# Altium PCB PCB_final.PcbDoc
Units mm, origin at the board's own origin, x right, y up, seen from the top; angles counter-clockwise.
Board outline 99.57 x 101.6 mm, 4 copper layers (Top Layer, Mid Layer 1, Mid Layer 2, Bottom Layer), stack 1.57 mm thick; 55 components, 55 nets, 307 pads, 1 vias.
Unrouted connection lines stored in the file: 1.
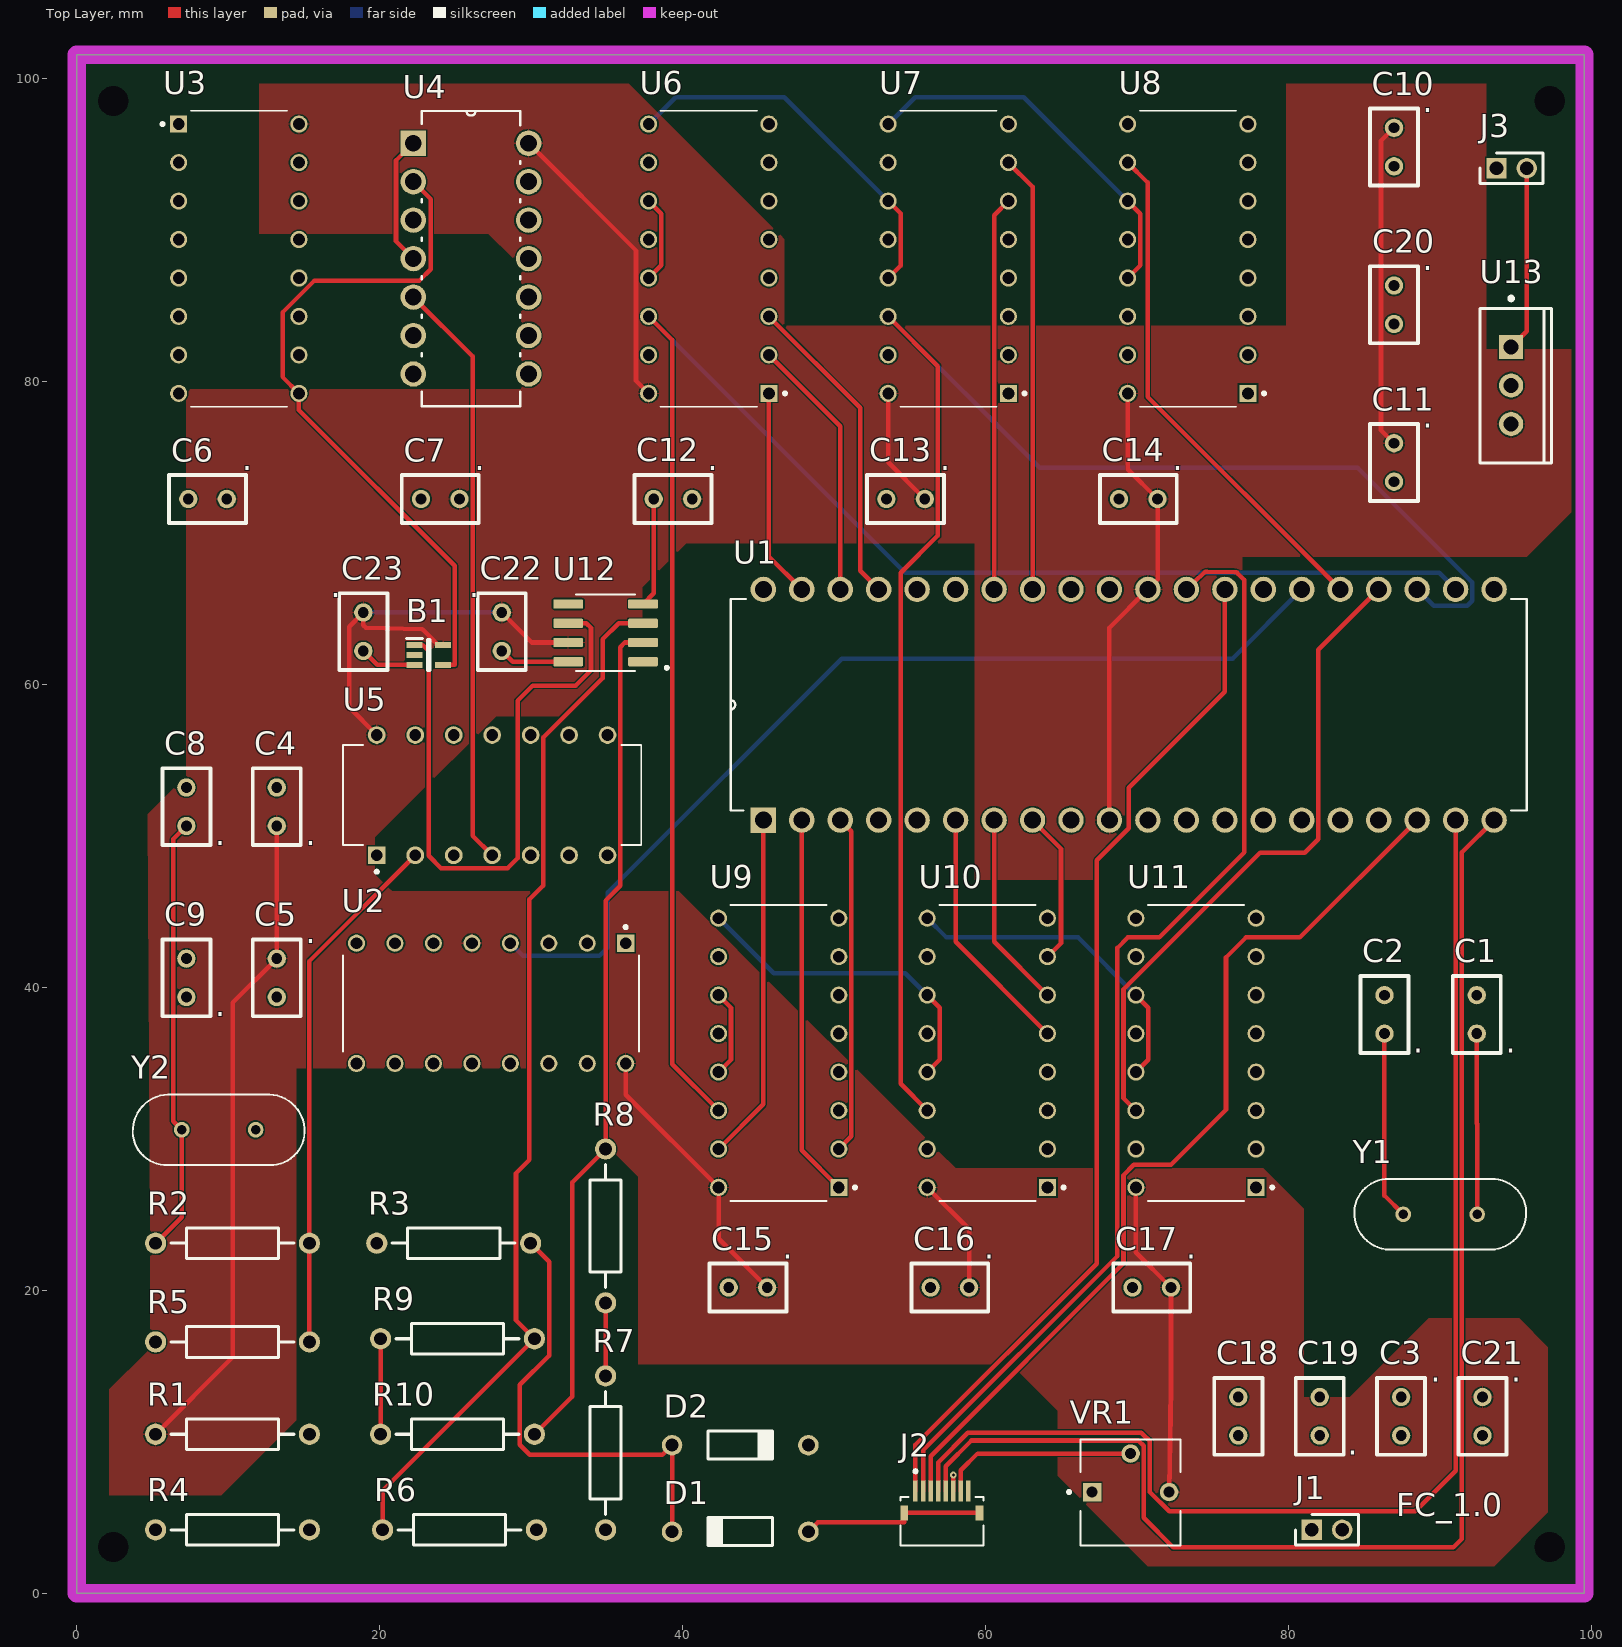
[diagram p0: Top Layer view]
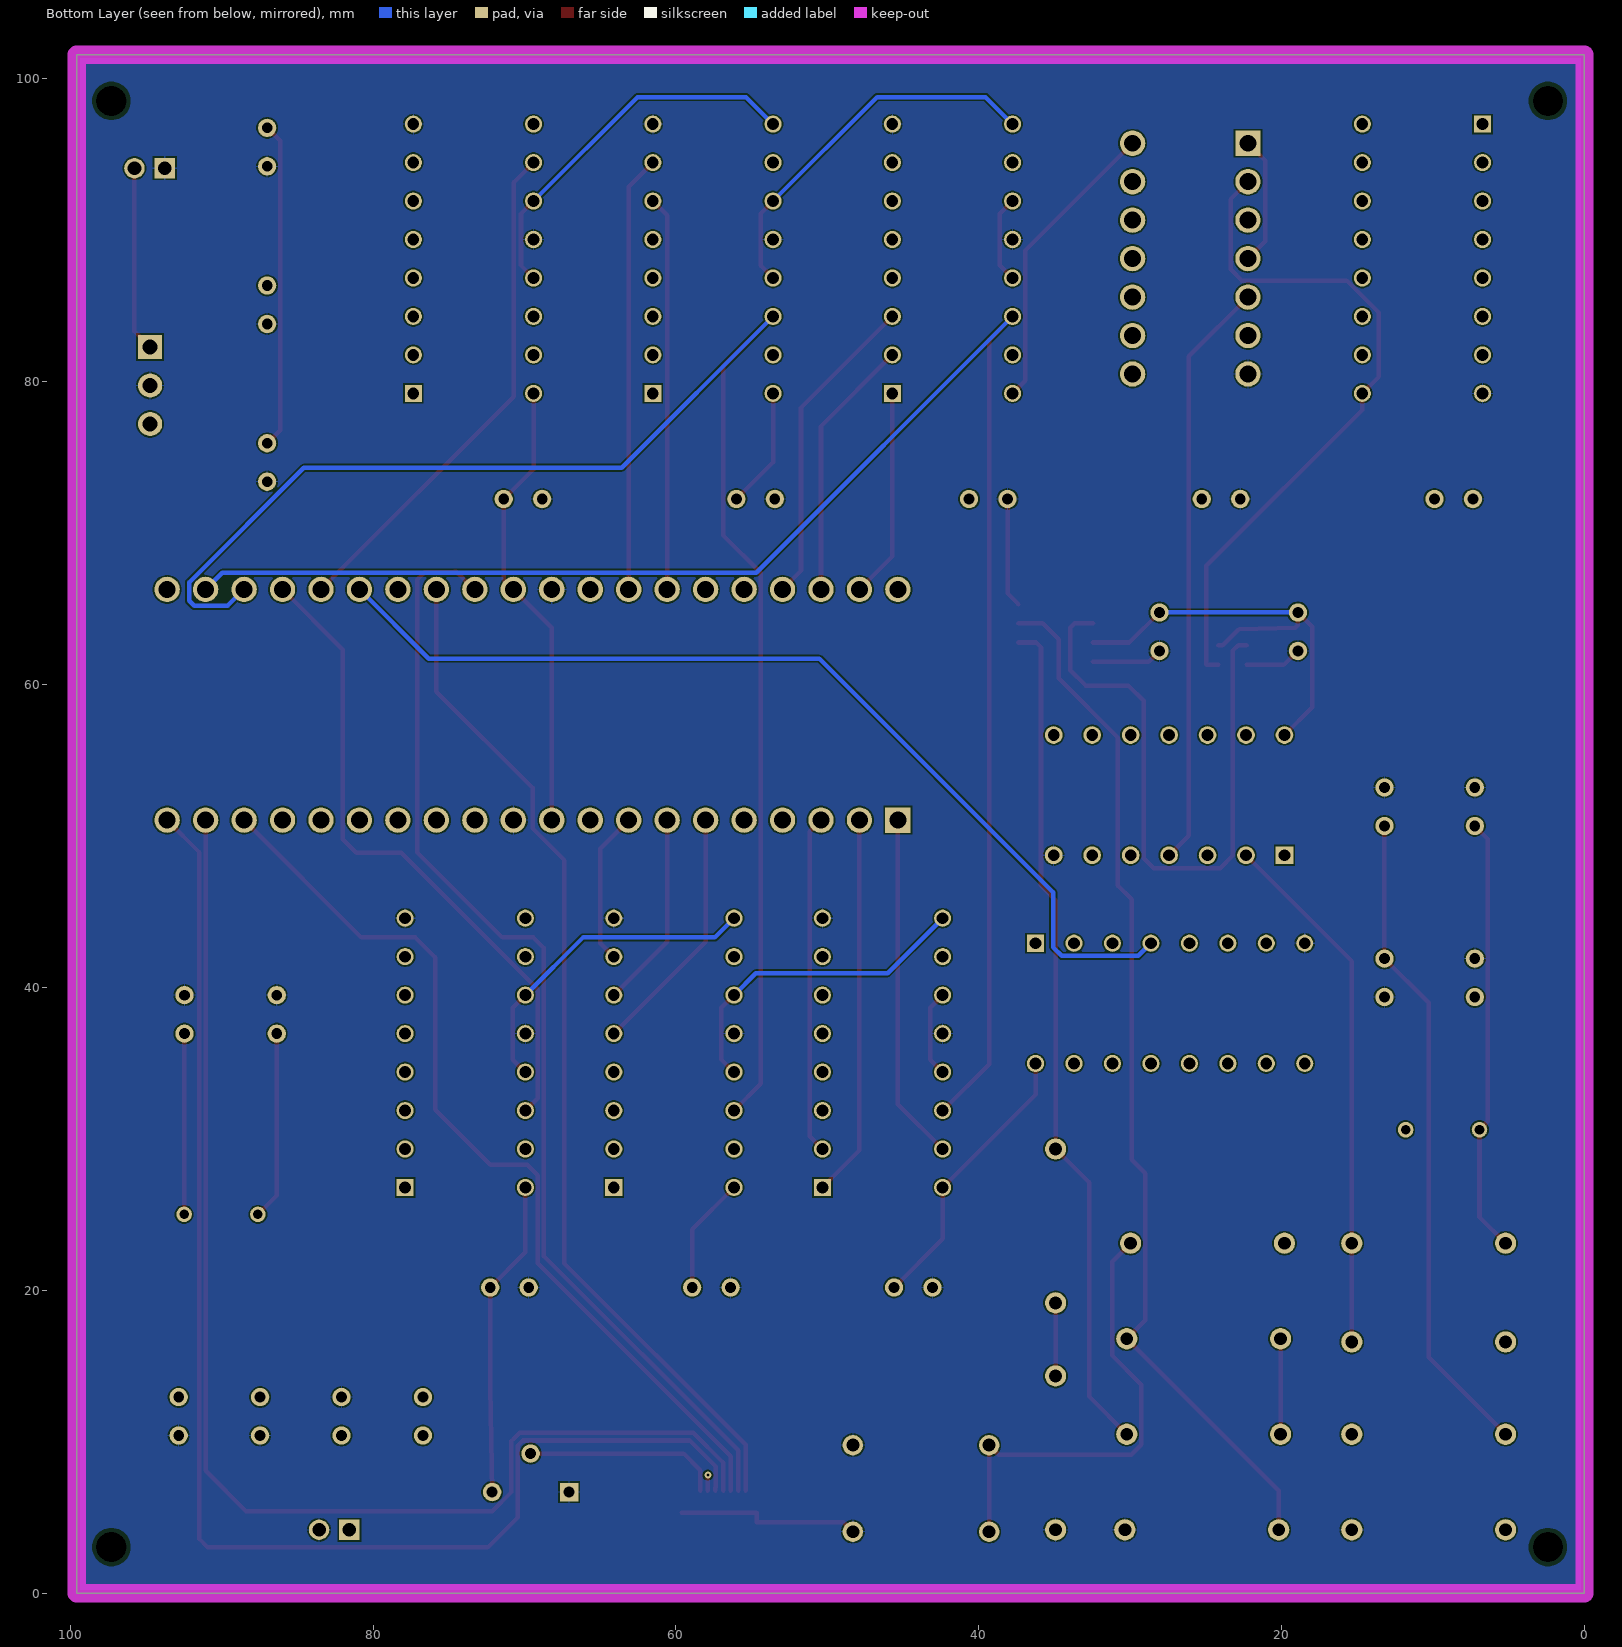
[diagram p1: Bottom Layer view, seen from below]
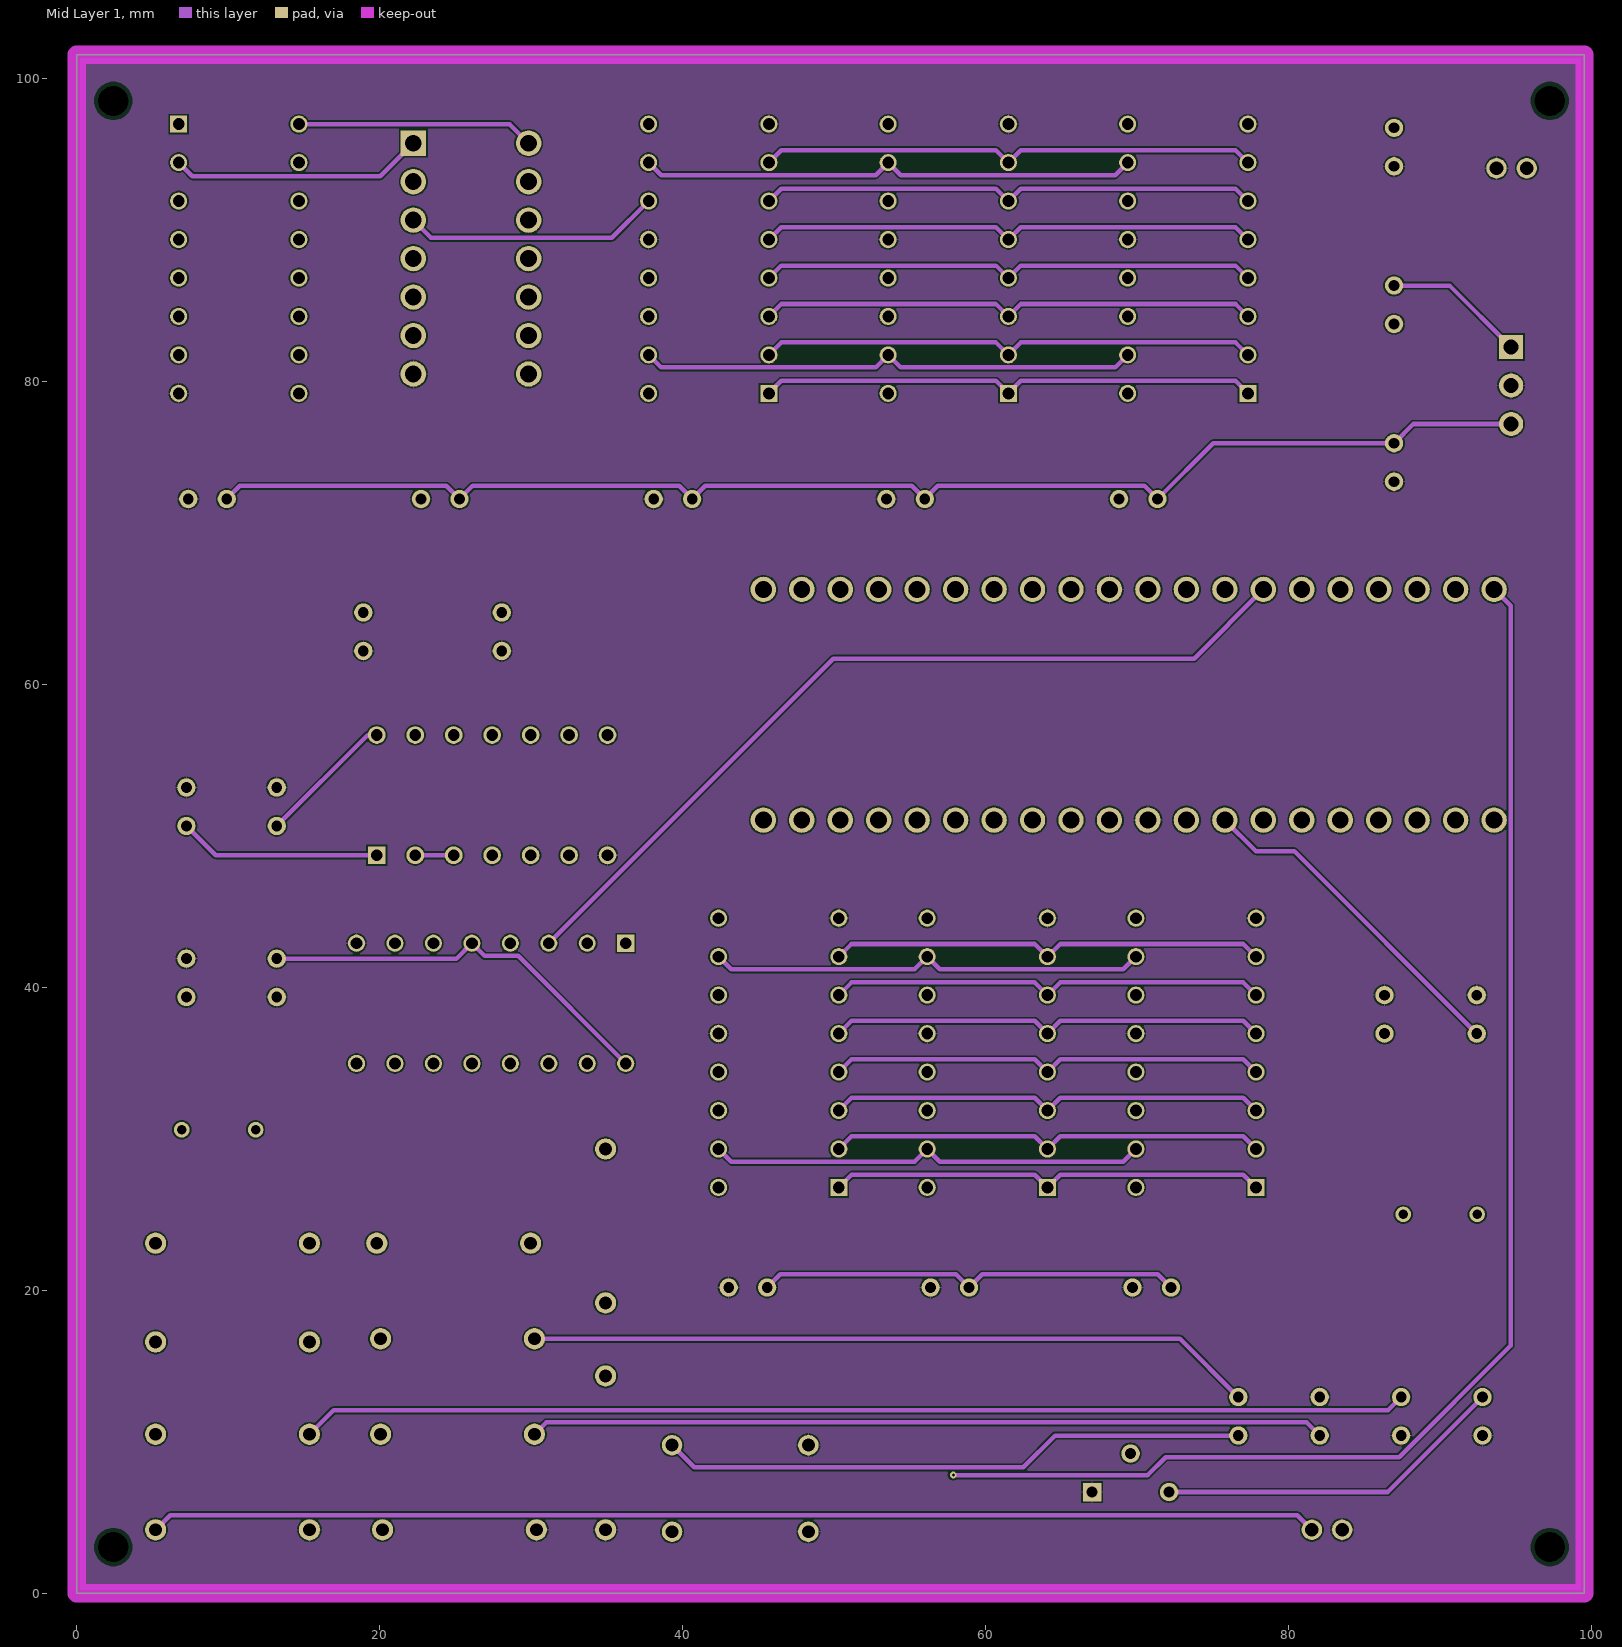
[diagram p2: Mid Layer 1]
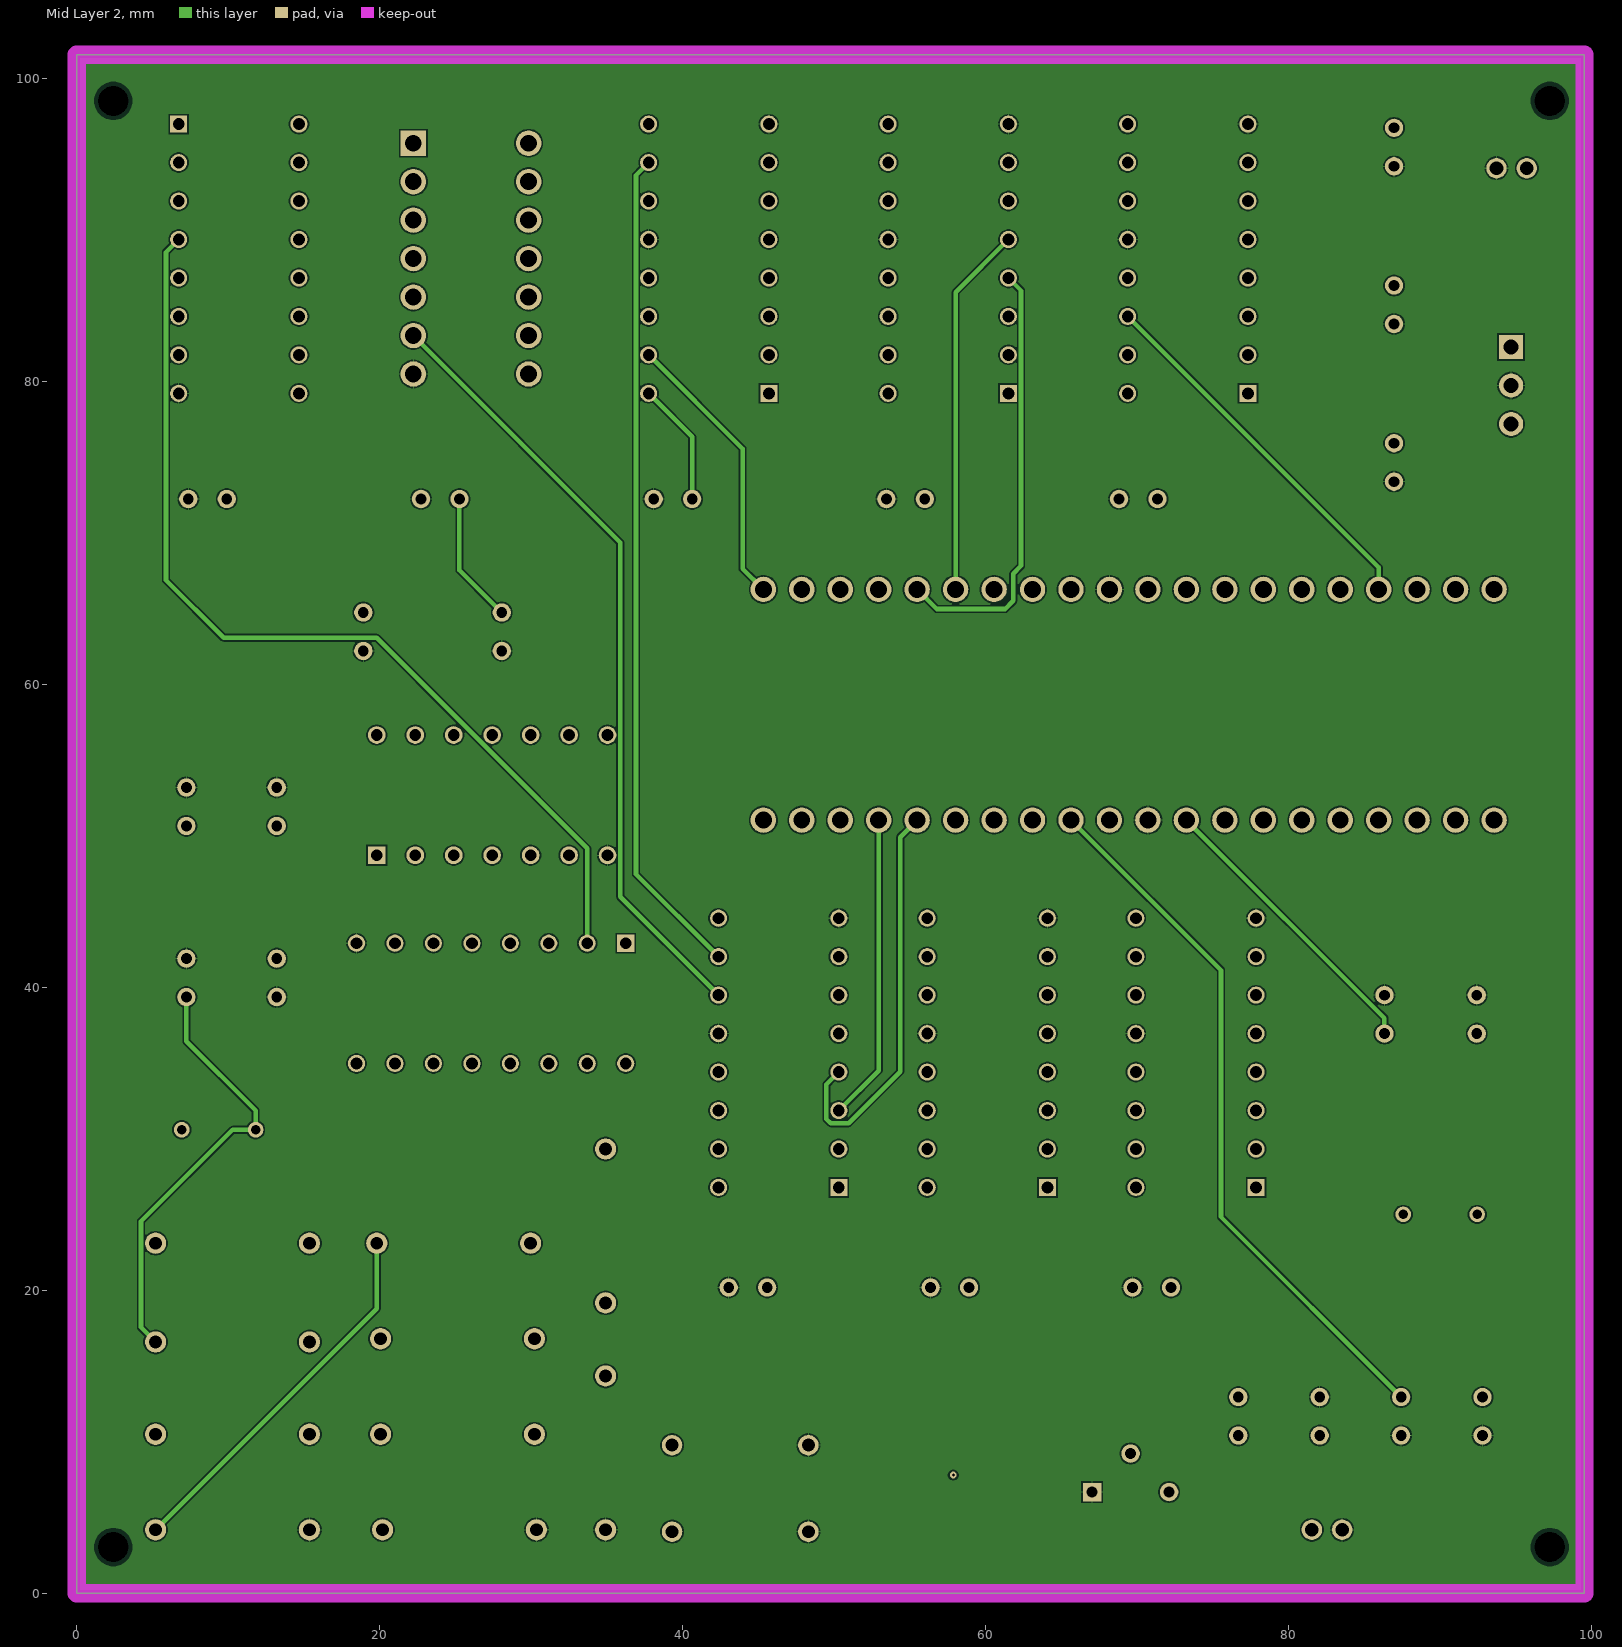
[diagram p3: Mid Layer 2]

## Layer stack, top to bottom
Top Solder: solder mask 0.0127, Solder Resist, Dk 3.8
Top Layer: signal copper 0.035
Dielectric 1: prepreg 0.1, 2313, Dk 4.05
Mid Layer 1: signal copper 0.0175
Core: core 1.265, FR-4, Dk 4.5
Mid Layer 2: signal copper 0.0175
Dielectric 2: prepreg 0.1, 2313, Dk 4.05
Bottom Layer: signal copper 0.035
Bottom Solder: solder mask 0.0127, Solder Resist, Dk 3.8

## Board outline
0,101.6 99.568,101.6 99.568,0 0,0

## Design rules (kind name [scope] priority, off if disabled: settings)
BoardOutlineClearance [All] p1: gap=0.2 ignorepadtopadclearanceinfootprint=FALSE
Clearance [All] p1: gap=0.102 ignorepadtopadclearanceinfootprint=FALSE except(0.127: Arc-Via Track-Via SMDPad-Via THPad-Via Via-Via Via-Fill Via-Poly Via-Region Via-Text; 0.25: Arc-Hole Track-Hole SMDPad-Hole THPad-Hole Via-Hole Fill-Hole Poly-Hole Region-Hole Text-Hole)
ComponentClearance [All] p1: gap=0.102 collisioncheckmode=3 verticalgap=0.102 showdistances=TRUE
DiffPairsRouting [All] p1: maxlimit=0.102 minlimit=0.102 mostfreqgap=0.102 toplayer_minwidth=0.102 toplayer_maxwidth=1816.048 toplayer_prefwidth=0.102 midlayer1_minwidth=0.102 midlayer1_maxwidth=1816.048 midlayer1_prefwidth=0.102 midlayer2_minwidth=0.102 midlayer2_maxwidth=1816.048 midlayer2_prefwidth=0.102 bottomlayer_minwidth=0.102 bottomlayer_maxwidth=1816.048 bottomlayer_prefwidth=0.102 maxuncoupledlength=12.7
Height [All] p1: minheight=0 maxheight=1816.048 prefheight=12.7
HoleSize [All] p1: absolutevalues=TRUE maxlimit=6.3 minlimit=0.2 maxpercent=80.000 minpercent=20.000
HoleToHoleClearance [All] p1: gap=0.25 allowstackedmicrovias=FALSE
MinimumAnnularRing [All] p1: minimumring=0.076
MinimumSolderMaskSliver [All] p1: minsoldermaskwidth=0
PlaneClearance [All] p1: clearance=0.102
PlaneConnect PlaneConnectPowerPads [InPadClass('PowerPads')] p1: planeconnectstyle=Direct reliefexpansion=0.508 reliefentries=4 reliefconductorwidth=0.254 reliefairgap=0.254
PlaneConnect [All] p2: pad.planeconnectstyle=Relief pad.reliefexpansion=0.3 pad.reliefentries=4 pad.reliefconductorwidth=0.102 pad.reliefairgap=0.102 via.planeconnectstyle=Direct via.reliefexpansion=0.3 via.reliefentries=4 via.reliefconductorwidth=0.127 via.reliefairgap=0.127
PolygonConnect PolygonConnectPowerPads [All vs (InPadClass('PowerPads'))] p1: connectstyle=Direct reliefconductorwidth=0.254 reliefentries=4 polygonreliefangle="90 Angle" airgapwidth=0.254
PolygonConnect [All] p2: thpad.connectstyle=Relief thpad.reliefconductorwidth=0.102 thpad.reliefentries=4 thpad.polygonreliefangle="90 Angle" thpad.airgapwidth=0.102 smdpad.connectstyle=Relief smdpad.reliefconductorwidth=0.102 smdpad.reliefentries=4 smdpad.polygonreliefangle="90 Angle" smdpad.airgapwidth=0.102 via.connectstyle=Direct via.reliefconductorwidth=0.127 via.reliefentries=4 via.polygonreliefangle="90 Angle" via.airgapwidth=0.127
RoomDefinition FC_schemetic [InComponentClass('FC_schemetic')] p1: confinementstyle=ConfineIn formatcopy=TRUE lockcomponents=FALSE outline 0,0 99.568,0 99.568,101.6 0,101.6
RoutingVias [All] p1: holewidth=0.2 width=0.45 viastyle="Through Hole" minholewidth=0.2 minwidth=0.45 maxholewidth=6.3 maxwidth=6.55
SilkToSilkClearance [All] p1: silktosilkclearance=0
SilkToSolderMaskClearance [IsPad] p1: minsilkscreentomaskgap=0.102 clearancetoexposedcopper=TRUE
SolderMaskExpansion [All] p1: expansion=0.075 istentingtop=FALSE
Width [All] p1: maxlimit=1 minlimit=0.2 preferedwidth=0.3 minimp=50.000000 maximp=50.000000 favimp=50.000000
20 further rules are at their usual default settings.

## Components (designator, comment, footprint, x,y, rotation, side; value= is the part's Value field where it differs from the comment)
B1 "74AHC1G4208GWH" SOT65P212X110-5N 23.241,61.958 r0 top
C1 "SR201C223KAR" AVX-SR20 92.456,38.227 r270 top
C2 "SR201C223KAR" AVX-SR20 86.36,38.227 r270 top
C3 "SR201C223KAR" AVX-SR20 87.461,11.684 r90 top
C4 "SR201C223KAR" AVX-SR20 13.208,51.943 r270 top
C5 "SR201C223KAR" AVX-SR20 13.208,40.64 r90 top
C6 "SR201C223KAR" AVX-SR20 8.636,72.263 r0 top
C7 "SR201C223KAR" AVX-SR20 24.003,72.263 r0 top
C8 "SR201C223KAR" AVX-SR20 7.239,51.943 r270 top
C9 "SR201C223KAR" AVX-SR20 7.239,40.64 r270 top
C10 "SR201C223KAR" AVX-SR20 86.995,95.504 r90 top
C11 "SR201C223KAR" AVX-SR20 86.995,74.676 r90 top
C12 "SR201C223KAR" AVX-SR20 39.37,72.263 r0 top
C13 "SR201C223KAR" AVX-SR20 54.737,72.263 r0 top
C14 "SR201C223KAR" AVX-SR20 70.104,72.263 r0 top
C15 "SR201C223KAR" AVX-SR20 44.323,20.193 r0 top
C16 "SR201C223KAR" AVX-SR20 57.658,20.193 r0 top
C17 "SR201C223KAR" AVX-SR20 70.993,20.193 r0 top
C18 "SR201C223KAR" AVX-SR20 76.708,11.684 r270 top
C19 "SR201C223KAR" AVX-SR20 82.084,11.684 r270 top
C20 "SR201C223KAR" AVX-SR20 86.995,85.09 r90 top
C21 "SR201C223KAR" AVX-SR20 92.837,11.684 r90 top
C22 "SR201C223KAR" AVX-SR20 28.067,63.5 r270 top
C23 "SR201C223KAR" AVX-SR20 18.923,63.5 r270 top
D1 "1N4148" NXP-SOD27-2_V 43.815,4.064 r180 top
D2 "1N4148" NXP-SOD27-2_V 43.815,9.779 r0 top
J1 "M22-2010205" HDRV2W50P0X200_1X2_400X200X525P 81.566,4.191 r0 top
J2 "59453-082110EDHLF" AMPHENOL_59453-082110EDHLF 57.138,5.305 r0 top
J3 "M22-2010205" HDRV2W50P0X200_1X2_400X200X525P 93.758,94.107 r0 top
R1 "Res2" AXIAL-0.4 10.287,10.499 r180 top value=1K
R2 "Res2" AXIAL-0.4 10.287,23.114 r180 top value=1K
R3 "Res2" AXIAL-0.4 24.892,23.114 r180 top value=1K
R4 "Res2" AXIAL-0.4 10.287,4.191 r0 top value=1K
R5 "Res2" AXIAL-0.4 10.287,16.595 r180 top value=1K
R6 "Res2" AXIAL-0.4 25.273,4.191 r180 top value=1K
R7 "Res2" AXIAL-0.4 34.925,9.271 r90 top value=1K
R8 "Res2" AXIAL-0.4 34.925,24.257 r90 top value=1K
R9 "Res2" AXIAL-0.4 25.146,16.806 r180 top value=1K
R10 "Res2" AXIAL-0.4 25.146,10.499 r180 top value=1K
U1 "ATMEGA32A-PU" DIP254P1524X482-40 93.599,66.294 r90 top
U2 "CD4043BE" DIP794W45P254L1969H508Q16 27.362,38.956 r270 top
U3 "SN74LS175N" DIP794W45P254L1969H508Q16 10.701,88.129 r0 top
U4 "74HC08N,652" DIP254P762X420-14 29.843,80.518 r0 top
U5 "SN7414N" DIP794W45P254L1969H508Q14 27.432,52.705 r90 top
U6 "SN74HC590AN" DIP794W45P254L1969H508Q16 41.738,88.129 r180 top
U7 "SN74HC590AN" DIP794W45P254L1969H508Q16 57.555,88.129 r180 top
U8 "SN74HC590AN" DIP794W45P254L1969H508Q16 73.373,88.129 r180 top
U9 "SN74HC590AN" DIP794W45P254L1969H508Q16 46.355,35.687 r180 top
U10 "SN74HC590AN" DIP794W45P254L1969H508Q16 60.134,35.687 r180 top
U11 "SN74HC590AN" DIP794W45P254L1969H508Q16 73.914,35.687 r180 top
U12 "TLV3501AIDR" SOIC127P599X175-8N 34.925,63.422 r180 top
U13 "LM7805CT" FAIR-TO-220-3 94.723,79.756 r0 top
VR1 "3362P-1-253LF" TRIM_3362P-1-253LF 69.596,6.685 r0 top
Y1 "ECS-240.0001-18-1X" XTAL_ECS-200-20-1X 90.043,25.019 r180 top
Y2 "ECS-240.0001-18-1X" XTAL_ECS-200-20-1X 9.371,30.607 r0 top

## Footprints (in the part's own frame and the unit in brackets; to place one, negate y for a bottom-side part, rotate by r counter-clockwise, add the part's x,y. Pads: shape width x height; smd on the part's side, far side on the other; paste and mask are expansions set on the pad)
AMPHENOL_59453-082110EDHLF [mm]
  rect 0.3x1.4 smd: 1(-1.75,1.45) 2(-1.25,1.45) 3(-0.75,1.45) 4(-0.25,1.45) 5(0.25,1.45) 6(0.75,1.45) 7(1.25,1.45) 8(1.75,1.45)
  rect 0.52x1 smd: S1(-2.49,0) S2(2.49,0)
  silkscreen extent -2.75,-2.15 2.75,2.85
AVX-SR20 [mm]
  round 1.21 hole 0.71: 1(-1.27,0) 2(1.27,0)
  silkscreen extent -2.54,-1.59 2.54,1.59
AXIAL-0.4 [mm] "Axial Device, Thru-Hole; 2 Leads; 0.4 in Pin Spacing"
  round 1.4 hole 0.85: 1(-5.08,0) 2(5.08,0)
  silkscreen extent -4.06,-1.02 4.06,1.02
DIP254P762X420-14 [mil]
  rect 66x66 hole 44: 1(-300,600)
  round 66 hole 44: 2(-300,500) 3(-300,400) 4(-300,300) 5(-300,200) 6(-300,100) 7(-300,0) 8(0,0) 9(0,100) 10(0,200) 11(0,300) 12(0,400) 13(0,500) 14(0,600)
  silkscreen extent -278,-84 -22,684
DIP254P1524X482-40 [mil]
  rect 66x66 / inner round 66 / far side rect 66x66 hole 44: 1(-600,1900)
  round 66 hole 44: 2(-600,1800) 3(-600,1700) 4(-600,1600) 5(-600,1500) 6(-600,1400) 7(-600,1300) 8(-600,1200) 9(-600,1100) 10(-600,1000) 11(-600,900) 12(-600,800) 13(-600,700) 14(-600,600) 15(-600,500) 16(-600,400) 17(-600,300) 18(-600,200) 19(-600,100) 20(-600,0) 21(0,0) 22(0,100) 23(0,200) 24(0,300) 25(0,400) 26(0,500) 27(0,600) 28(0,700) 29(0,800) 30(0,900) 31(0,1000) 32(0,1100) 33(0,1200) 34(0,1300) 35(0,1400) 36(0,1500) 37(0,1600) 38(0,1700) 39(0,1800) 40(0,1900)
  silkscreen extent -575,-85 -25,1985
DIP794W45P254L1969H508Q14 [mm]
  rect 1.17x1.17 hole 0.77: 1(-3.97,7.62)
  round 1.17 hole 0.77: 2(-3.97,5.08) 3(-3.97,2.54) 4(-3.97,0) 5(-3.97,-2.54) 6(-3.97,-5.08) 7(-3.97,-7.62) 8(3.97,-7.62) 9(3.97,-5.08) 10(3.97,-2.54) 11(3.97,0) 12(3.97,2.54) 13(3.97,5.08) 14(3.97,7.62)
  silkscreen extent -5.15,-9.84 3.3,9.84
DIP794W45P254L1969H508Q16 [mm]
  rect 1.13x1.13 hole 0.78: 1(-3.97,8.89)
  round 1.13 hole 0.78: 2(-3.97,6.35) 3(-3.97,3.81) 4(-3.97,1.27) 5(-3.97,-1.27) 6(-3.97,-3.81) 7(-3.97,-6.35) 8(-3.97,-8.89) 9(3.97,-8.89) 10(3.97,-6.35) 11(3.97,-3.81) 12(3.97,-1.27) 13(3.97,1.27) 14(3.97,3.81) 15(3.97,6.35) 16(3.97,8.89)
  silkscreen extent -5.13,-9.77 3.18,9.77
FAIR-TO-220-3 [mm] "FM, 3-Leads, Body 10.2x4.7mm, Pitch 2.54mm"
  rect 1.6x1.6 hole 1: 1(0,2.54)
  round 1.6 hole 1: 2(0,0) 3(0,-2.54)
  silkscreen extent -2.04,-5.1 2.66,5.87, body extent -2.04,-5.1 2.66,5.1, height 18.95
HDRV2W50P0X200_1X2_400X200X525P [mm]
  rect 1.35x1.35 / inner round 1.35 / far side rect 1.35x1.35 hole 0.9: 1(0,0)
  round 1.35 hole 0.9: 2(2,0)
  silkscreen extent -1.07,-1 3.07,1
NXP-SOD27-2_V [mm] "SOD27, 2-Leads, Dia 1.85mm, Body Length 4.25mm, Pin Spacing 9mm"
  round 1.35 hole 0.85: 1(-4.5,0) 2(4.5,0)
  silkscreen extent -2.13,-0.93 2.13,0.93, body extent -4.78,-0.93 4.78,0.92, height 1.85
SOIC127P599X175-8N [mm]
  rrect25% 1.97x0.6 smd: 1(-2.47,1.905) 2(-2.47,0.635) 3(-2.47,-0.635) 4(-2.47,-1.905) 5(2.47,-1.905) 6(2.47,-0.635) 7(2.47,0.635) 8(2.47,1.905)
  silkscreen extent -4.14,-2.53 1.95,2.53, body extent -3,-2.45 3,2.45, height 1.75
SOT65P212X110-5N [mm]
  rect 1.05x0.4 smd: 1(-0.95,0.65) 2(-0.95,0) 3(-0.95,-0.65) 4(0.95,-0.65) 5(0.95,0.65)
  silkscreen extent -1.48,-1.02 0.07,1.1
TRIM_3362P-1-253LF [mm]
  rect 1.222x1.222 hole 0.714: 1(-2.54,0)
  round 1.222 hole 0.714: 2(0,2.54) 3(2.54,0)
  silkscreen extent -4.16,-3.53 3.3,3.47
XTAL_ECS-200-20-1X [mm]
  round 1.03 hole 0.63: 1(-2.44,0) 2(2.44,0)
  silkscreen extent -5.68,-2.33 5.68,2.33

## Part data
B1: "vp_74AHC1G4208.ditamap - 8-stage divider and oscillator@en-us", Manufacturer_Name=Nexperia, Mouser Part Number=771-74AHC1G4208GWH, Arrow Part Number=74AHC1G4208GWH, Arrow Price/Stock=https://www.arrow.com/en/products/74ahc1g4208gwh/nexperia?region=nac, Datasheet Link=https://assets.nexperia.com/documents/data-sheet/74AHC1G4208.pdf, Geometry.Height=1.1mm, Manufacturer_Part_Number=74AHC1G4208GWH, Mouser Price/Stock=https://www.mouser.co.uk/ProductDetail/Nexperia/74AHC1G4208GWH?qs=17u8i%2FzlE8%2FxKrIMt8zS2A%3D%3D
C1 C2 C3 C4 C5 C6 C7 C8 C9 C10 C11 C12 C13 C14 C15 C16 C17 C18 C19 C20 C21 C22 C23: "Cap Ceramic 0.022uF 100V X7R 10% Radial 2.54mm 125C Bulk", Manufacturer_Name=AVX, Arrow Part Number=SR201C223KAR, Arrow Price/Stock=https://www.arrow.com/en/products/sr201c223kar/avx, Datasheet Link=http://datasheets.avx.com/SR-Series.pdf, Manufacturer_Part_Number=SR201C223KAR
D1 D2: library part CMP-004-00000-2, "High Speed Diode, 100 V, 0.45 A, -65 to 175 degC, 2-Pin SOD27, RoHS, Bulk", Case/Package=DO, Forward Current=300mA, Forward Voltage=1V, Manufacturer=Fairchild, Max Operating Temperature=175°C, Max Surge Current=4A, Min Operating Temperature=-65°C, Package Quantity=2000, Package Reference=SOD27, Peak Reverse Current=5uA, Power=500mW, Datasheet URL=http://www.nxp.com/documents/data_sheet/1N4148_1N4448.pdf, Datasheet Version=Aug-04, Diameter=1.91mm, Elements=1, Manufacturer URL=https://www.fairchildsemi.com/, Package URL=http://www.nxp.com/documents/data_sheet/1N4148_1N4448.pdf, Packaging=Bulk, Pins=2, Recovery Time=4ns, RoHS Compliant=True
J1 J3: "Header, SIL, vertical, 2 way, 2mm pitch HARWIN M22-20 Series, 2mm Pitch 2 Way 1 Row Straight PCB Header, Solder Termination, 1A", Manufacturer_Name=Harwin, Mouser Part Number=855-M22-2010205, Datasheet Link=http://uk.rs-online.com/web/p/products/6813287, Geometry.Height=5.25mm, Manufacturer_Part_Number=M22-2010205, Mouser Price/Stock=https://www.mouser.co.uk/ProductDetail/Harwin/M22-2010205?qs=xxdqPuaJ%252Ba2I8VeWvpQIzQ%3D%3D
J2: "0.50mm Flex Connectors, FPC/FFC Side Entry ZIF Connector, Surface Mount, 8 Positions, Top Contact, 0.50mm (0.020in) Pitch", Package=None, Availability="In Stock", Check_prices=https://www.snapeda.com/parts/59453-082110EDHLF/Amphenol%20FCI/view-part/5519599/?ref=eda, MF="Amphenol ICC (FCI)", MP=59453-082110EDHLF, Price=None, SnapEDA_Link=https://www.snapeda.com/parts/59453-082110EDHLF/Amphenol%20FCI/view-part/5519599/?ref=snap
R1 R2 R3 R4 R5 R6 R7 R8 R9 R10: "Resistor", LatestRevisionDate=17-Jul-2002, LatestRevisionNote="Re-released for DXP Platform.", PackageDescription="Axial Device, Thru-Hole; 2 Leads; 0.4 in Pin Spacing", PackageReference=AXIAL-0.4, Published=8-Jun-2000, Publisher="Altium Limited"
U1: "AVR AVRÂ® ATmega Microcontroller IC 8-Bit 16MHz 32KB (16K x 16) FLASH 40-PDIP", Package="PDIP-40 Microchip", Availability="In Stock", Check_prices=https://www.snapeda.com/parts/ATMEGA32A-PU/Microchip/view-part/?ref=eda, MF=Microchip, MP=ATMEGA32A-PU, Price=None, Purchase-URL=https://pricing.snapeda.com/search/part/ATMEGA32A-PU/?ref=eda, SnapEDA_Link=https://www.snapeda.com/parts/ATMEGA32A-PU/Microchip/view-part/?ref=snap
U2: "CMOS Quad NOR R/S Latch with 3-State Outputs 16-PDIP -55 to 125", Package="PDIP-16 Texas Instruments", Arrow_Electronics-Purchase-URL=https://snapeda.com/shop?store=Arrow+Electronics&id=577167, Availability=Good, BuyPart=https://www.snapeda.com/parts/CD4043BE/Texas%20Instruments/view-part/577167/?ref=eda, DigiKey-Purchase-URL=https://snapeda.com/shop?store=DigiKey&id=577167, MF="Texas Instruments", Mouser-Purchase-URL=https://snapeda.com/shop?store=Mouser&id=577167, MP=CD4043BE, Price=None, SnapEDA_Link=https://www.snapeda.com/parts/CD4043BE/Texas%20Instruments/view-part/577167/?ref=snap, Texas_Instruments-Purchase-URL=https://snapeda.com/shop?store=Texas+Instruments&id=577167
U3: "Quadruple D-Type Flip-Flops With Clear 16-PDIP 0 to 70", Package="PDIP-16 Texas Instruments", Check_prices=https://www.snapeda.com/parts/SN74LS175N/Texas%20Instruments/view-part/572262/?ref=eda, Digi-Key_Part_Number=296-28719-2-ND, MF="Texas Instruments", MP=SN74LS175N, Purchase-URL=https://pricing.snapeda.com/search/part/SN74LS175N/?ref=eda, SnapEDA_Link=https://www.snapeda.com/parts/SN74LS175N/Texas%20Instruments/view-part/572262/?ref=snap
U4: "AND Gate IC 4 Channel 14-DIP", Package="DIP-14 NXP Semiconductors", Availability=Warning, BuyPart=https://www.snapeda.com/parts/74HC08N,652/NXP%20USA%20Inc./view-part/41634/?ref=eda, DigiKey-Purchase-URL=https://snapeda.com/shop?store=DigiKey&id=41634, MF="NXP USA", MP=74HC08N,652, Price=None, SnapEDA_Link=https://www.snapeda.com/parts/74HC08N,652/NXP%20USA%20Inc./view-part/41634/?ref=snap
U5: "Hex schmitt-trigger inverters 14-PDIP 0 to 70", Package="PDIP-14 Texas Instruments", Availability=Warning, Check_prices=https://www.snapeda.com/parts/SN7414N/Texas%20Instruments/view-part/51455/?ref=eda, DigiKey-Purchase-URL=https://snapeda.com/shop?store=DigiKey&id=51455, MF="Texas Instruments", Mouser-Purchase-URL=https://snapeda.com/shop?store=Mouser&id=51455, MP=SN7414N, Price=None, SnapEDA_Link=https://www.snapeda.com/parts/SN7414N/Texas%20Instruments/view-part/51455/?ref=snap, Texas_Instruments-Purchase-URL=https://snapeda.com/shop?store=Texas+Instruments&id=51455
U6 U7 U8 U9 U10 U11: "8-Bit Binary Counters With 3-State Output Registers 16-PDIP -40 to 85", Package="PDIP-16 Texas Instruments", BuyPart=https://www.snapeda.com/parts/SN74HC590AN/Texas%20Instruments/view-part/385662/?ref=eda, Digi-Key_Part_Number=SN74HC590ANG4-ND, MF="Texas Instruments", MP=SN74HC590AN, SnapEDA_Link=https://www.snapeda.com/parts/SN74HC590AN/Texas%20Instruments/view-part/385662/?ref=snap, Texas_Instruments-Purchase-URL=https://snapeda.com/shop?store=Texas+Instruments&id=385662
U12: "4.5ns, Rail-to-Rail, High Speed Comparator with Shutdown 8-SOIC -40 to 125", Package="SOIC-8 Texas Instruments", Check_prices=https://www.snapeda.com/parts/TLV3501AIDR/Texas+Instruments/view-part/?ref=eda, Digi-Key_Part_Number=296-43611-1-ND, MF="Texas Instruments", MP=TLV3501AIDR, Purchase-URL=https://pricing.snapeda.com/search/part/TLV3501AIDR/?ref=eda, SnapEDA_Link=https://www.snapeda.com/parts/TLV3501AIDR/Texas+Instruments/view-part/?ref=snap
U13: library part CMP-2000-04938-1, "Positive Voltage Regulator, 5 V, 1 A, -40 to 125 degC, 3-Pin TO-220, RoHS, Tube", Manufacturer=FairchildSemiconductor, Maximum Input Voltage=35V, Maximum Output Current=2.2(Typ)A, Maximum Quiescent Current=8mA, Operating Temperature=-40to125degC, Output Voltage=5V, Package=3TO-220AB, Package Description="3-Pin Through Hole Device, Body 10 x 4.5 mm, Pitch 2.54 mm", Package Reference=TO-220, Typical Dropout Voltage @ Current=2@1AV, Accuracy=±4%, Category=LinearRegulator, Datasheet URL=https://datasheet.ciiva.com/26904/lm7805ct-26904988.pdf, Datasheet Version=Aug-12, Line Regulation=100mV, Load Regulation=100mV, Manufacturer URL=https://www.fairchildsemi.com/, Mounting=ThroughHole, Number of Outputs=1, Output Type=Fixed, Package URL=https://www.fairchildsemi.com/package-drawings/TO/TO220B03.pdf, Packaging=Rail/Tube, Polarity=Positive, Rad Hard=No, Type=Linear
VR1: "25 kOhms 0.5W, 1/2W PC Pins Through Hole Trimmer Potentiometer Cermet 1 Turn Top Adjustment", Package="3116 Bourns", Availability=Good, Check_prices=https://www.snapeda.com/parts/3362P-1-253LF/Bourns/view-part/493663/?ref=eda, MF=Bourns, MP=3362P-1-253LF, Price=None, Purchase-URL=https://pricing.snapeda.com/search/part/3362P-1-253LF/?ref=eda, SnapEDA_Link=https://www.snapeda.com/parts/3362P-1-253LF/Bourns/view-part/493663/?ref=snap
Y1 Y2: "Crystals / Oscillators / Resonators 24.00014MHz 18pF", Package="HC49/U ECS International", Availability=Unavailable, MF="ECS International", MP=ECS-240.0001-18-1X, Price=None, SnapEDA_Link=https://www.snapeda.com/parts/ECS-240.0001-18-1X/ECS%20International/view-part/259232/?ref=snap

## Free pads (board coordinates)
  round 0 hole 2 unplated: 9(2.413,3.048) 9(2.413,98.552) 9(97.282,3.048) 9(97.282,98.552)

## Via types
v1: diameter 0.45, hole 0.2, Top Layer to Bottom Layer, 1 vias

## Nets (pads, with @x,y where several pads share a name; then routed paths per layer and width w, separated by ;. In a path a pad name is that pad's centre, name@x,y a point inside that pad or via, vN(x,y) a via of type N, cw(c..) or ccw(c..) an arc to the next point about the centre after c; other vN are vias at no path point)
+5: B1.5 C4.2 C5.2 C6.2 C7.2 C10.2 C11.2 C12.2 C13.2 C14.2 C15.2 C16.2 C17.2 C21.2 C22.1 C23.1 R1.2 U1.10 U1.30 U2.5 U2.16 U3.16 U4.14 U5.14 U6.16 U7.16 U8.16 U9.16 U10.16 U11.16 U12.7 U13.3 VR1.3 | length 410.3
  Top Layer w0.3: R1.2 10.287,15.579 10.287,38.989 C5.2 C4.2 ; U5.14 17.983,58.504 17.983,63.83 C23.1 18.923,63.924 19.096,63.75 22.81,63.674 22.896,63.588 23.876,62.608 B1.5 ; C22.1 30.05,62.787 U12.7 ; U4.14 36.932,88.67 36.932,80.076 U6.16 ; U2.16 36.252,32.93 U9.16 42.385,23.401 C15.2 ; U7.16 53.585,74.685 C13.2 ; U10.16 58.928,24.033 C16.2 ; U1.10 68.199,63.754 U1.30 71.374,66.929 C14.2 69.403,74.234 U8.16 ; U11.16 69.944,22.512 C17.2 72.263,13.589 VR1.3 ; C11.2 86.131,76.81 86.131,95.91 C10.2
  Mid Layer 1 w0.3: C6.2 10.77,73.127 24.409,73.127 C7.2 26.137,73.127 39.776,73.127 C12.2 41.504,73.127 55.143,73.127 C13.2 56.871,73.127 70.51,73.127 C14.2 75.057,75.946 C11.2 88.265,77.216 U13.3 ; C5.2 25.076,41.91 U2.5 26.93,42.088 29.15,42.088 U2.16 ; C4.2 19.21,56.675 U5.14 ; U3.16 28.582,97.019 U4.14 ; C15.2 46.457,21.057 58.064,21.057 C16.2 59.792,21.057 71.399,21.057 C17.2 ; VR1.3 86.568,6.685 C21.2
  Mid Layer 2 w0.3: C7.2 25.273,67.564 C22.1 ; U6.16 40.64,76.367 C12.2
  Bottom Layer w0.3: C23.1 C22.1
GND: B1.3 C1.1 C2.1 C3.1 C4.1 C5.1 C6.1 C7.1 C8.1 C9.1 C10.1 C11.1 C12.1 C13.1 C14.1 C15.1 C16.1 C17.1 C19.1 C20.1 C21.1 C22.2 C23.2 D1.1 D2.2 J1.2 J2.S1 J2.S2 J3.1 R4.2 R6.1 R7.1 U1.11 U1.31 U2.8 U3.8 U4.7 U5.7 U6.8 U6.12 U7.8 U7.12 U8.8 U8.12 U9.8 U9.12 U10.8 U10.12 U11.8 U11.12 U12.4 U12.8 U13.2 VR1.1 | length 27.9
  Top Layer w0.3: C23.2 19.845,61.308 B1.3 ; C22.2 28.78,61.517 U12.8 ; U12.4 38.1,66.032 C12.1 ; D1.1 48.925,4.674 54.648,4.674 J2.S1 J2.S2
NetB1_1: B1.1 U12.6 | length 41.6
  Top Layer w0.3: B1.1 22.863,62.608 23.241,62.23 23.241,48.692 24.054,47.879 28.448,47.879 29.108,48.539 29.108,58.928 30.124,59.944 32.944,59.944 33.96,60.96 33.96,63.754 33.657,64.057 U12.6
NetB1_4: B1.4 U3.9 U4.2 | length 46
  Top Layer w0.3: U4.2 23.368,92.073 23.368,87.427 22.631,86.69 15.697,86.69 13.589,84.582 13.589,80.321 U3.9 14.671,78.141 24.968,67.843 24.968,61.308 B1.4
NetC1_2: C1.2 U1.13 Y1.1 | length 34.4
  Top Layer w0.3: C1.2 92.456,31.015 92.483,30.988 Y1.1
  Mid Layer 1 w0.3: U1.13 77.876,48.997 80.416,48.997 C1.2
NetC2_2: C2.2 U1.12 Y1.2 | length 32
  Top Layer w0.3: C2.2 86.36,26.262 Y1.2
  Mid Layer 2 w0.3: U1.12 86.36,37.973 C2.2
NetC3_2: C3.2 R1.1 U1.9 | length 120.2
  Mid Layer 1 w0.3: R1.1 16.959,12.09 86.597,12.09 C3.2
  Mid Layer 2 w0.3: U1.9 75.565,41.148 75.565,24.85 C3.2
NetC8_2: C8.2 R2.2 U5.1 Y2.1 | length 42.2
  Top Layer w0.3: R2.2 6.931,24.838 Y2.1 6.375,31.163 6.375,49.809 C8.2
  Mid Layer 1 w0.3: C8.2 9.177,48.735 U5.1
NetC9_2: C9.2 R5.2 Y2.2 | length 29.1
  Mid Layer 2 w0.3: R5.2 4.242,17.56 4.242,24.562 10.287,30.607 Y2.2 11.811,31.877 7.239,36.449 C9.2
NetC18_1: C18.1 R6.2 R9.1 U12.3 | length 117
  Top Layer w0.3: R6.2 20.193,6.773 R9.1 29.007,18.026 29.007,27.737 29.896,28.626 29.896,45.822 30.81,46.736 30.81,56.515 34.722,60.427 34.722,62.992 35.786,64.057 U12.3
  Mid Layer 1 w0.3: R9.1 72.856,16.806 C18.1
NetC18_2: C18.2 D1.2 D2.1 R3.1 | length 69.8
  Top Layer w0.3: R3.1 31.191,21.895 31.191,15.697 29.261,13.767 29.261,9.804 29.921,9.144 38.68,9.144 D2.1 D1.2
  Mid Layer 1 w0.3: D2.1 40.785,8.309 62.509,8.309 64.615,10.414 C18.2
NetC19_2: C19.2 R8.2 R10.1 U12.2 | length 108.5
  Top Layer w0.3: R10.1 32.715,12.988 32.715,27.127 R8.2 34.925,45.745 35.89,46.711 35.89,62.484 36.193,62.787 U12.2
  Mid Layer 1 w0.3: R10.1 31.005,11.278 81.221,11.278 C19.2
NetC20_2: C20.2 J3.2 U13.1 | length 21.7
  Top Layer w0.3: U13.1 95.758,83.331 J3.2
  Mid Layer 1 w0.3: C20.2 90.659,86.36 U13.1
NetJ1_1: J1.1 R3.2 R4.1 | length 102.1
  Mid Layer 1 w0.3: R4.1 6.172,5.156 80.601,5.156 J1.1
  Mid Layer 2 w0.3: R4.1 19.812,18.796 R3.2
NetJ2_1: J2.1 U1.28 | length 68
  Top Layer w0.3: J2.1 55.388,9.795 67.361,21.768 67.361,48.412 69.469,50.521 69.469,53.188 75.819,59.538 U1.28
NetJ2_2: J2.2 U1.29 | length 74.6
  Top Layer w0.3: J2.2 55.888,9.431 68.726,22.269 68.726,42.615 69.418,43.307 71.476,43.307 77.089,48.92 77.089,66.925 77.003,67.013 76.681,67.34 76.594,67.427 76.472,67.429 74.641,67.457 ccw(c74.637,67.158) 74.639,67.457 74.518,67.458 74.431,67.376 U1.29
NetJ2_3: J2.3 U1.18 | length 61.1
  Top Layer w0.3: J2.3 56.388,9.053 69.127,21.792 69.127,27.61 69.813,28.296 72.263,28.296 75.895,31.928 75.895,41.986 77.216,43.307 80.772,43.307 U1.18
NetJ2_4: J2.4 U1.19 | length 85.1
  Top Layer w0.3: J2.4 56.888,8.635 58.845,10.592 70.307,10.592 70.671,10.228 70.685,10.228 70.86,10.052 70.86,6.686 72.136,5.41 88.392,5.41 91.059,8.077 U1.19
NetJ2_5: J2.5 U1.20 | length 90.7
  Top Layer w0.3: J2.5 57.388,6.998 57.384,6.998 57.384,8.387 59.084,10.087 70.104,10.087 70.459,9.733 70.459,4.979 72.415,3.023 90.907,3.023 91.465,3.581 91.465,48.92 U1.20
NetJ2_6: J2.6 U1.21 | length 91.8
  Top Layer w0.3: v1(57.887,7.798) 57.888,7.796 J2.6
  Mid Layer 1 w0.3: v1(57.887,7.798) 70.714,7.798 71.907,8.992 87.325,8.992 94.691,16.358 94.691,65.202 U1.21
NetJ2_7: J2.7 VR1.2 | length 13
  Top Layer w0.3: J2.7 58.388,7.296 58.389,8.126 59.487,9.225 VR1.2
NetR2_1: R2.1 R5.1 U5.2 U5.3 | length 37.6
  Top Layer w0.3: R5.1 R2.1 15.367,41.75 U5.2
  Mid Layer 1 w0.3: U5.2 U5.3
NetR7_2: R7.2 R8.1 | length 4.8
  Top Layer w0.3: R7.2 R8.1
NetR9_2: R9.2 R10.2 | length 6.3
  Top Layer w0.3: R10.2 R9.2
NetU1_1: U1.1 U9.15 U10.15 U11.15 | length 51.9
  Top Layer w0.3: U9.15 45.339,32.291 U1.1
  Mid Layer 1 w0.3: U9.15 43.223,28.499 55.326,28.499 U10.15 57.003,28.499 69.106,28.499 U11.15
NetU1_2: U1.2 U9.1 U10.1 U11.1 | length 54.2
  Top Layer w0.3: U1.2 47.879,29.243 U9.1
  Mid Layer 1 w0.3: U9.1 51.163,27.635 63.266,27.635 U10.1 64.943,27.635 77.046,27.635 U11.1
NetU1_3: U1.3 U9.2 U10.2 U11.2 | length 51.3
  Top Layer w0.3: U9.2 51.156,30.168 51.156,50.317 U1.3
  Mid Layer 1 w0.3: U9.2 51.163,30.175 63.266,30.175 U10.2 64.943,30.175 77.046,30.175 U11.2
NetU1_4: U1.4 U9.3 U10.3 U11.3 | length 49.2
  Mid Layer 1 w0.3: U9.3 51.163,32.715 63.266,32.715 U10.3 64.943,32.715 77.046,32.715 U11.3
  Mid Layer 2 w0.3: U9.3 52.959,34.511 U1.4
NetU1_5: U1.5 U9.4 U10.4 U11.4 | length 55.9
  Mid Layer 1 w0.3: U9.4 51.163,35.255 63.266,35.255 U10.4 64.943,35.255 77.046,35.255 U11.4
  Mid Layer 2 w0.3: U9.4 49.505,33.597 49.505,31.318 49.784,31.039 50.978,31.039 54.381,34.442 54.381,49.936 U1.5
NetU1_6: U1.6 U9.5 U10.5 U11.5 | length 45.6
  Top Layer w0.3: U1.6 58.039,43.023 U10.5
  Mid Layer 1 w0.3: U9.5 51.163,37.795 63.266,37.795 U10.5 64.943,37.795 77.046,37.795 U11.5
NetU1_7: U1.7 U9.6 U10.6 U11.6 | length 42
  Top Layer w0.3: U1.7 60.579,43.023 U10.6
  Mid Layer 1 w0.3: U9.6 51.163,40.335 63.266,40.335 U10.6 64.943,40.335 77.046,40.335 U11.6
NetU1_8: U1.8 U9.7 U10.7 U11.7 | length 39.1
  Top Layer w0.3: U1.8 64.999,49.174 64.999,42.931 U10.7
  Mid Layer 1 w0.3: U9.7 51.163,42.875 63.266,42.875 U10.7 64.943,42.875 77.046,42.875 U11.7
NetU1_22: U1.22 U6.14 U9.14 | length 115.1
  Top Layer w0.3: U6.14 39.319,82.768 39.319,34.943 U9.14
  Bottom Layer w0.3: U6.14 54.701,67.386 89.967,67.386 U1.22
NetU1_23: U1.23 U7.14 U10.14 | length 106.8
  Top Layer w0.3: U7.14 56.871,81.034 56.871,69.85 54.407,67.386 54.407,33.635 U10.14
  Bottom Layer w0.3: U7.14 63.584,74.32 84.582,74.32 92.151,66.751 92.151,65.532 91.821,65.202 89.611,65.202 U1.23
NetU1_24: U1.24 U8.14 U11.14 | length 68.4
  Top Layer w0.3: U11.14 69.127,32.694 69.127,39.878 78.144,48.895 81.102,48.895 81.991,49.784 81.991,62.306 U1.24
  Mid Layer 2 w0.3: U8.14 85.979,67.743 U1.24
NetU1_25: U1.25 U6.10 U7.10 U8.10 U9.10 U10.10 U11.10 | length 151
  Top Layer w0.3: U8.10 70.714,93.169 70.714,79.019 U1.25
  Mid Layer 1 w0.3: U6.10 38.597,93.65 52.756,93.65 U7.10 54.415,93.65 68.573,93.65 U8.10 ; U9.10 43.223,41.199 55.326,41.199 U10.10 57.003,41.199 69.106,41.199 U11.10
  Mid Layer 2 w0.3: U6.10 36.932,93.643 36.932,47.49 U9.10
NetU1_26: U1.26 U2.4 | length 64.8
  Bottom Layer w0.3: U2.4 29.47,42.088 34.519,42.088 35.077,42.647 35.077,46.279 50.521,61.722 76.327,61.722 U1.26
NetU1_27: U1.27 U2.3 | length 56.9
  Mid Layer 1 w0.3: U2.3 49.968,61.722 73.787,61.722 U1.27
NetU1_33: U1.33 U6.7 U7.7 U8.7 | length 61.8
  Top Layer w0.3: U7.7 63.119,92.886 U1.33
  Mid Layer 1 w0.3: U6.7 46.529,95.301 60.704,95.301 U7.7 62.347,95.301 76.522,95.301 U8.7
NetU1_34: U1.34 U6.6 U7.6 U8.6 | length 59
  Top Layer w0.3: U1.34 60.579,90.993 U7.6
  Mid Layer 1 w0.3: U6.6 46.529,92.761 60.704,92.761 U7.6 62.347,92.761 76.522,92.761 U8.6
NetU1_35: U1.35 U6.5 U7.5 U8.5 | length 57.5
  Mid Layer 1 w0.3: U6.5 46.529,90.221 60.704,90.221 U7.5 62.347,90.221 76.522,90.221 U8.5
  Mid Layer 2 w0.3: U1.35 58.039,85.913 U7.5
NetU1_36: U1.36 U6.4 U7.4 U8.4 | length 62
  Mid Layer 1 w0.3: U6.4 46.529,87.681 60.704,87.681 U7.4 62.347,87.681 76.522,87.681 U8.4
  Mid Layer 2 w0.3: U1.36 56.794,64.999 61.316,64.999 61.849,65.532 61.849,67.335 62.357,67.843 62.357,86.028 U7.4
NetU1_37: U1.37 U6.3 U7.3 U8.3 | length 54
  Top Layer w0.3: U6.3 51.74,78.287 51.74,67.513 U1.37
  Mid Layer 1 w0.3: U6.3 46.529,85.141 60.704,85.141 U7.3 62.347,85.141 76.522,85.141 U8.3
NetU1_38: U1.38 U6.2 U7.2 U8.2 | length 50.4
  Top Layer w0.3: U6.2 50.419,77.068 U1.38
  Mid Layer 1 w0.3: U6.2 46.529,82.601 60.704,82.601 U7.2 62.347,82.601 76.522,82.601 U8.2
NetU1_39: U1.39 U6.1 U7.1 U8.1 | length 46.8
  Top Layer w0.3: U6.1 45.708,68.465 U1.39
  Mid Layer 1 w0.3: U6.1 46.529,80.061 60.704,80.061 U7.1 62.347,80.061 76.522,80.061 U8.1
NetU1_40: U1.40 U6.15 U7.15 U8.15 | length 51.6
  Mid Layer 1 w0.3: U6.15 38.597,80.95 52.756,80.95 U7.15 54.415,80.95 68.573,80.95 U8.15
  Mid Layer 2 w0.3: U6.15 43.967,75.58 43.967,67.666 U1.40
NetU2_2: U2.2 U3.4 | length 64.3
  Mid Layer 2 w0.3: U3.4 5.893,88.561 5.893,66.904 9.703,63.094 19.812,63.094 33.712,49.194 U2.2
NetU3_2: U3.2 U4.1 U4.4 | length 25.3
  Top Layer w0.3: U4.4 21.082,89.279 21.082,94.617 U4.1
  Mid Layer 1 w0.3: U3.2 7.637,93.574 20.039,93.574 U4.1
NetU4_3: U4.3 U6.11 U6.13 | length 22.8
  Top Layer w0.3: U6.13 38.608,87.699 38.608,91.099 U6.11
  Mid Layer 1 w0.3: U4.3 23.392,89.51 35.338,89.51 U6.11
NetU4_5: U4.5 U5.4 | length 39
  Top Layer w0.3: U4.5 26.137,81.685 26.137,50.03 U5.4
NetU4_6: U4.6 U9.11 U9.13 | length 57.7
  Top Layer w0.3: U9.13 43.205,35.237 43.205,38.677 U9.11
  Mid Layer 2 w0.3: U4.6 35.89,69.391 35.89,45.992 U9.11
NetU6_9: U6.9 U7.11 U7.13 | length 25.2
  Top Layer w0.3: U7.13 54.407,87.681 54.407,91.118 U7.11
  Bottom Layer w0.3: U6.9 39.555,98.806 46.719,98.806 U7.11
NetU7_9: U7.9 U8.11 U8.13 | length 25.2
  Top Layer w0.3: U8.13 70.231,87.687 70.231,91.111 U8.11
  Bottom Layer w0.3: U7.9 55.372,98.806 62.536,98.806 U8.11
NetU9_9: U9.9 U10.11 U10.13 | length 21.7
  Top Layer w0.3: U10.13 56.998,35.25 56.998,38.664 U10.11
  Bottom Layer w0.3: U9.9 46.017,40.945 54.717,40.945 U10.11
NetU10_9: U10.9 U11.11 U11.13 | length 21.6
  Top Layer w0.3: U11.13 70.764,35.237 70.764,38.677 U11.11
  Bottom Layer w0.3: U10.9 57.434,43.307 66.134,43.307 U11.11
pads on no net: B1.2 J2.8 U1.14 U1.15 U1.16 U1.17 U1.32 U2.1 U2.6 U2.7 U2.9 U2.10 U2.11 U2.12 U2.13 U2.14 U2.15 U3.1 U3.3 U3.5 U3.6 U3.7 U3.10 U3.11 U3.12 U3.13 U3.14 U3.15 U4.8 U4.9 U4.10 U4.11 U4.12 U4.13 U5.5 U5.6 U5.8 U5.9 U5.10 U5.11 U5.12 U5.13 U8.9 U11.9 U12.1 U12.5

## Polygon pours and split planes (outlines as drawn)
GND on Mid Layer 1 "GND_L02_P000" (solid, remove dead copper, pour order 0): 0,101.6 99.568,101.6 99.568,0 0,0
GND on Mid Layer 2 "GND_L03_P002" (solid, remove dead copper, pour order 2): 0,101.6 99.568,101.6 99.568,0 0,0
GND on Bottom Layer "GND_L04_P003" (solid, remove dead copper, pour order 3): 0,101.6 99.568,101.6 99.568,0 0,0
+5 on Top Layer "+5_L01_P007" (solid, remove dead copper, pour order 7): 12.065,99.695 36.449,99.695 46.736,89.408 46.736,83.693 52.07,83.693 79.883,83.693 79.883,99.187 79.883,99.695 80.645,99.695 93.091,99.695 93.091,83.439 93.091,82.169 98.679,82.169 98.679,71.374 95.758,68.453 76.962,68.453 76.962,51.054 73.025,47.117 66.929,47.117 59.309,47.117 59.309,51.689 59.309,69.342 40.259,69.342 37.338,66.421 37.338,57.912 27.686,57.912 19.685,49.911 19.685,47.498 20.828,46.355 39.751,46.355 58.039,28.067 78.359,28.067 81.026,25.4 81.026,12.954 84.074,12.954 89.281,18.161 95.25,18.161 97.155,16.256 97.155,15.494 97.155,5.334 93.599,1.778 70.739,1.778 64.77,7.747 64.77,12.065 61.722,15.113 37.084,15.113 37.084,27.512 29.76,34.671 25.777,34.671 14.478,34.671 14.478,12.954 14.478,11.43 9.525,6.477 2.159,6.477 2.159,13.462 4.875,16.178 4.699,51.435 7.239,53.975 7.239,79.502 8.128,79.502 9.525,79.502 29.337,79.502 29.337,87.63 27.178,89.789 12.065,89.789 12.065,92.075 12.065,92.71 12.065,93.599 12.065,99.568

## Keep-outs
Keep-Out Layer:
  the board outline again, w1.2

## Silkscreen, mask and mechanical layers (free items; w line width, h text height)
Top Overlay:
  text "." at 88.9,97.79 h1.52
  text "." at 88.9,87.376 h1.52
  text "." at 88.9,76.962 h1.52
  text "." at 10.922,74.168 h1.52
  text "." at 26.289,74.168 h1.52
  text "." at 41.656,74.168 h1.52
  text "." at 57.023,74.168 h1.52
  text "." at 72.39,74.168 h1.52
  text "." at 16.764,65.786 h1.52
  text "." at 25.908,65.786 h1.52
  text "." at 9.144,49.403 h1.52
  text "." at 15.113,49.403 h1.52
  text "." at 15.113,42.926 h1.52
  text "." at 9.144,38.1 h1.52
  text "." at 88.265,35.687 h1.52
  text "." at 94.361,35.687 h1.52
  text "." at 46.609,22.098 h1.52
  text "." at 59.944,22.098 h1.52
  text "." at 73.279,22.098 h1.52
  text "." at 89.408,13.97 h1.52
  text "." at 94.742,13.97 h1.52
  text "." at 83.947,9.144 h1.52
  text "FC_1.0" at 87.122,5.08 h1.52